# Altium PCB PCB.PcbDoc
Units mm, origin at the board's own origin, x right, y up, seen from the top; angles counter-clockwise.
Board outline 135 x 101 mm, 2 copper layers (Top Layer, Bottom Layer); 58 components, 37 nets, 347 pads, 5 vias.
Unrouted connection lines stored in the file: 178.
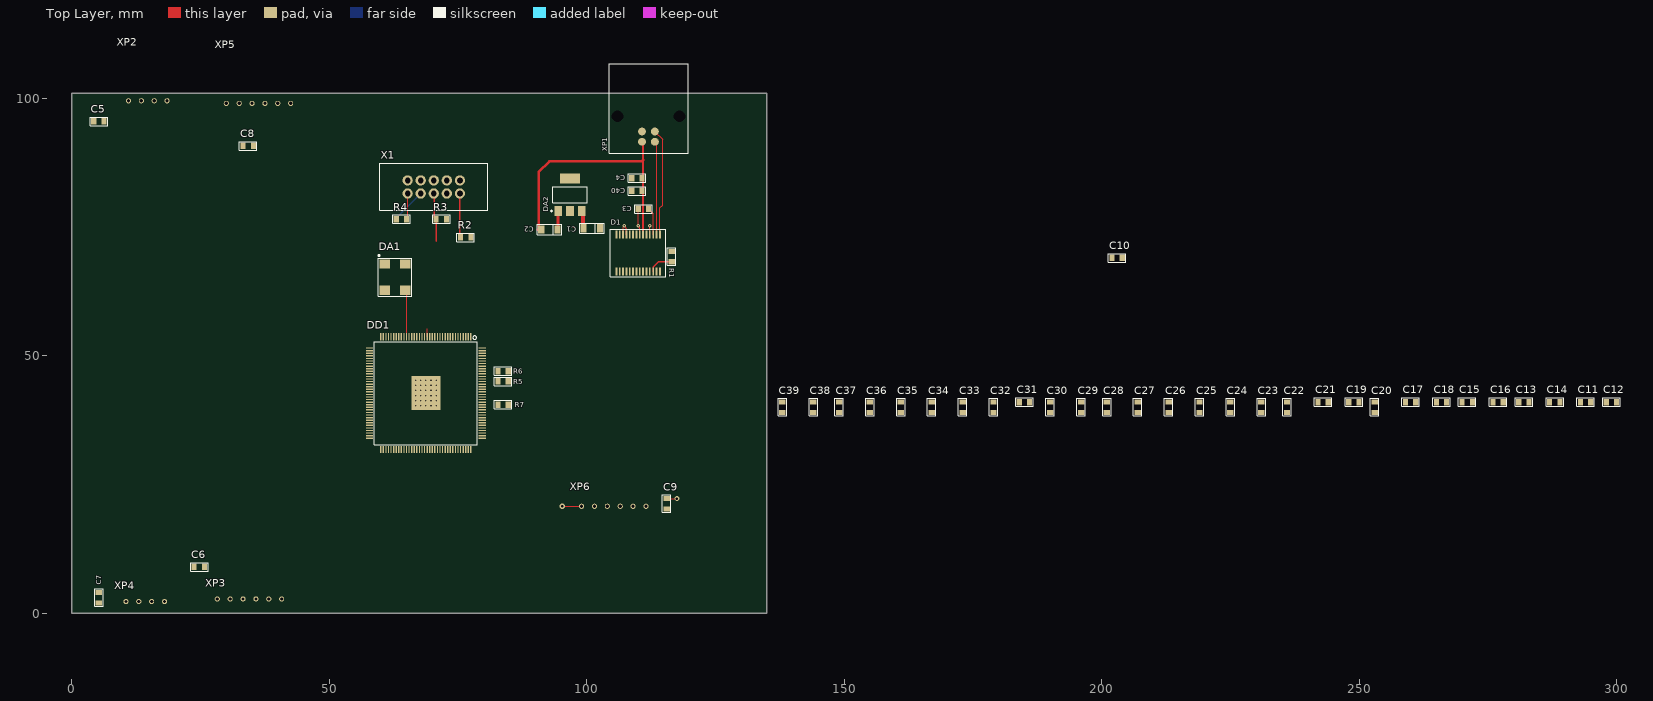
[diagram p0: Top Layer view]
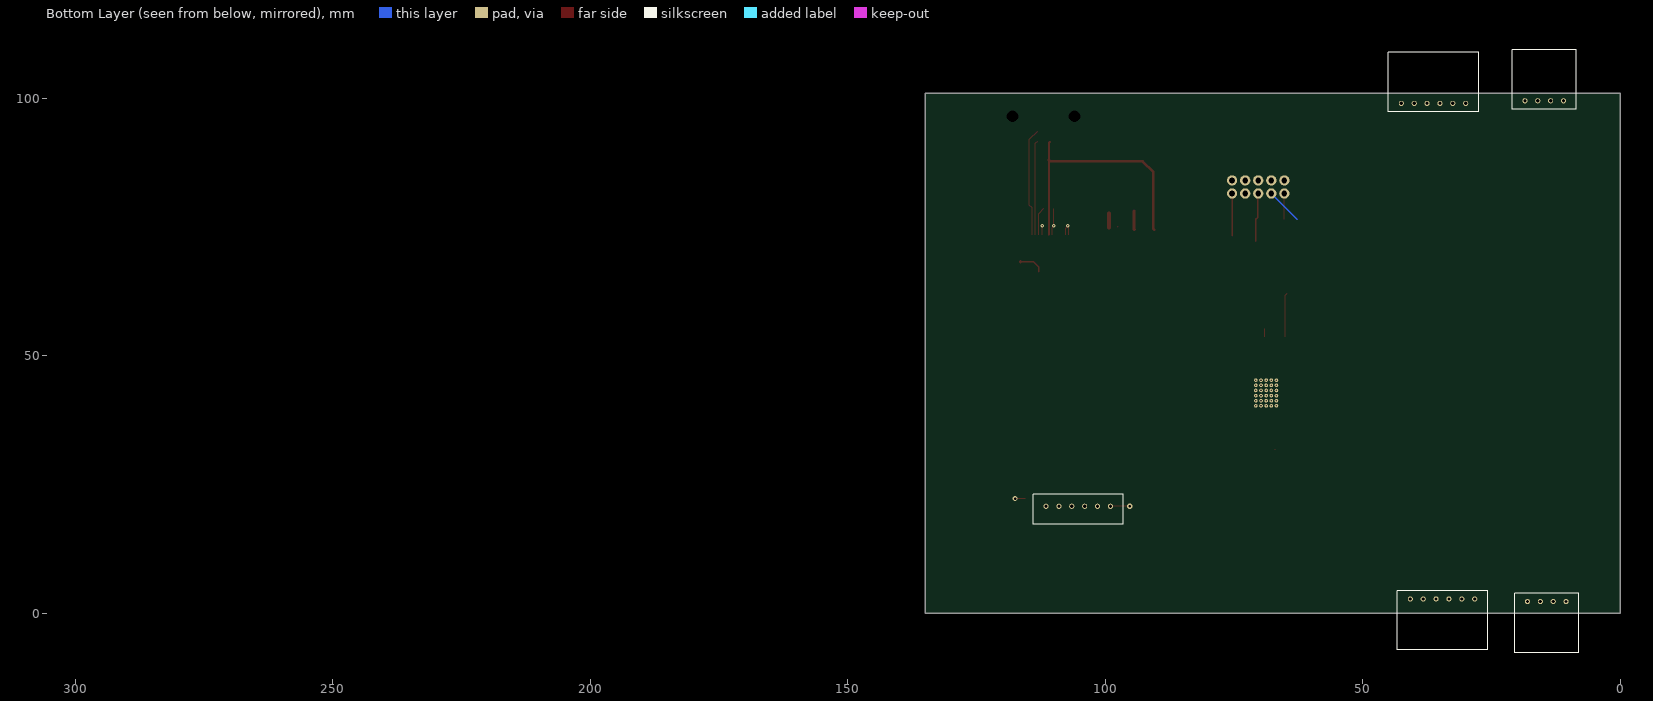
[diagram p1: Bottom Layer view, seen from below]

## Layer stack, top to bottom
Top Solder: solder mask 0.0102, Solder Resist, Dk 3.5
Top Layer: signal copper 0.0356
Dielectric 1: dielectric 0.32, FR-4, Dk 4.8
Bottom Layer: signal copper 0.0356
Bottom Solder: solder mask 0.0102, Solder Resist, Dk 3.5

## Board outline
0,0 0,101 135,101 135,0

## Design rules (kind name [scope] priority, off if disabled: settings)
Clearance [All] p1: gap=0.254 ignorepadtopadclearanceinfootprint=FALSE except(0: Arc-Hole Track-Hole SMDPad-Hole THPad-Hole Via-Hole Fill-Hole Poly-Hole Region-Hole Text-Hole)
PolygonConnect [All] p1: connectstyle=Relief reliefconductorwidth=0.254 reliefentries=4 polygonreliefangle="90 Angle" airgapwidth=0.254
RoutingVias [All] p1: holewidth=0.3 width=0.7 viastyle="Through Hole" minholewidth=0.3 minwidth=0.7 maxholewidth=0.3 maxwidth=0.7
SolderMaskExpansion [All] p1: expansion=0.102
Width [All] p1: maxlimit=0.8 minlimit=0.2 preferedwidth=0.4 bottomlayer_minwidth=0.3 minimp=50.000000 maximp=50.000000 favimp=50.000000
30 further rules are at their usual default settings.

## Classes and differential pairs
component class Page2: C11 C12 C13 C14 C15 C16 C17 C18 C19 C20 C21 C22 C23 C24 C25 C26 C27 C28 C29 C30 C31 C32 C33 C34 C35 C36 C37 C38 C39
component class Page1: C1 C2 C3 C4 C40 D1 DA2 R1 XP1
component class Connectors: C5 C6 C7 C8 C9 C10 DA1 DD1 R2 R3 R4 R5 R6 R7 X1 XP2 XP3 XP4 XP5 XP6 XP7

## Components (designator, comment, footprint, x,y, rotation, side; value= is the part's Value field where it differs from the comment)
C1 "Tantalum capacitor, 10μF, 10V, ±10%, 2Ohm, case A (3216), -55...+85°C" "CAP: TANTAL-A" 101,74.75 r180 top value=10?F
C2 "Tantalum capacitor, 10μF, 10V, ±10%, 2Ohm, case A (3216), -55...+85°C" "CAP: TANTAL-A" 92.75,74.5 r180 top value=10?F
C3 "Ceramic capacitor, 0.1μF, X7R, ±10%, , 0805, -55...+125°C" "CAP: 0805" 111,78.5 r180 top value=0.1?F
C4 "Ceramic capacitor, 0.1μF, X7R, ±10%, , 0805, -55...+125°C" "CAP: 0805" 109.75,84.5 r180 top value=0.1?F
C5 "Ceramic capacitor, 0.1μF, X7R, , , 0805," "CAP: 0805" 5.25,95.5 r0 top value=0.1?F
C6 "Ceramic capacitor, 0.1μF, X7R, , , 0805," "CAP: 0805" 24.75,9 r0 top value=0.1?F
C7 "Ceramic capacitor, 0.01μF, X7R, , , 0805," "CAP: 0805" 5.25,3 r90 top value=0.01?F
C8 "Ceramic capacitor, 0.1μF, X7R, , , 0805," "CAP: 0805" 34.25,90.75 r0 top value=0.1?F
C9 "Ceramic capacitor, 0.1μF, X7R, , , 0805," "CAP: 0805" 115.5,21.25 r90 top value=0.1?F
C10 "Ceramic capacitor, 0.1μF, X7R, , , 0805," "CAP: 0805" 203,69 r0 top value=0.1?F
C11 "Ceramic capacitor, 0.1μF, X7R, , , 0805," "CAP: 0805" 294,41 r0 top value=0.1?F
C12 "Ceramic capacitor, 0.1μF, X7R, , , 0805," "CAP: 0805" 299,41 r0 top value=0.1?F
C13 "Ceramic capacitor, 0.1μF, X7R, , , 0805," "CAP: 0805" 282,41 r0 top value=0.1?F
C14 "Ceramic capacitor, 0.1μF, X7R, , , 0805," "CAP: 0805" 288,41 r0 top value=0.1?F
C15 "Ceramic capacitor, 0.1μF, X7R, , , 0805," "CAP: 0805" 271,41 r0 top value=0.1?F
C16 "Ceramic capacitor, 0.1μF, X7R, , , 0805," "CAP: 0805" 277,41 r0 top value=0.1?F
C17 "Ceramic capacitor, 0.1μF, X7R, , , 0805," "CAP: 0805" 260,41 r0 top value=0.1?F
C18 "Ceramic capacitor, 0.1μF, X7R, , , 0805," "CAP: 0805" 266,41 r0 top value=0.1?F
C19 "Ceramic capacitor, 0.1μF, X7R, , , 0805," "CAP: 0805" 249,41 r0 top value=0.1?F
C20 "Ceramic capacitor, 0.1μF, X7R, , , 0805," "CAP: 0805" 253,40 r90 top value=0.1?F
C21 "Ceramic capacitor, 0.1μF, X7R, , , 0805," "CAP: 0805" 243,41 r0 top value=0.1?F
C22 "Ceramic capacitor, 0.1μF, X7R, , , 0805," "CAP: 0805" 236,40 r90 top value=0.1?F
C23 "Ceramic capacitor, 0.1μF, X7R, , , 0805," "CAP: 0805" 231,40 r90 top value=0.1?F
C24 "Ceramic capacitor, 0.1μF, X7R, , , 0805," "CAP: 0805" 225,40 r90 top value=0.1?F
C25 "Ceramic capacitor, 0.1μF, X7R, , , 0805," "CAP: 0805" 219,40 r90 top value=0.1?F
C26 "Ceramic capacitor, 0.1μF, X7R, , , 0805," "CAP: 0805" 213,40 r90 top value=0.1?F
C27 "Ceramic capacitor, 0.1μF, X7R, , , 0805," "CAP: 0805" 207,40 r90 top value=0.1?F
C28 "Ceramic capacitor, 0.1μF, X7R, , , 0805," "CAP: 0805" 201,40 r90 top value=0.1?F
C29 "Ceramic capacitor, 0.1μF, X7R, , , 0805," "CAP: 0805" 196,40 r90 top value=0.1?F
C30 "Ceramic capacitor, 0.1μF, X7R, , , 0805," "CAP: 0805" 190,40 r90 top value=0.1?F
C31 "Ceramic capacitor, 0.1μF, X7R, , , 0805," "CAP: 0805" 185,41 r0 top value=0.1?F
C32 "Ceramic capacitor, 0.1μF, X7R, , , 0805," "CAP: 0805" 179,40 r90 top value=0.1?F
C33 "Ceramic capacitor, 0.1μF, X7R, , , 0805," "CAP: 0805" 173,40 r90 top value=0.1?F
C34 "Ceramic capacitor, 0.1μF, X7R, , , 0805," "CAP: 0805" 167,40 r90 top value=0.1?F
C35 "Ceramic capacitor, 0.1μF, X7R, , , 0805," "CAP: 0805" 161,40 r90 top value=0.1?F
C36 "Ceramic capacitor, 0.1μF, X7R, , , 0805," "CAP: 0805" 155,40 r90 top value=0.1?F
C37 "Ceramic capacitor, 0.1μF, X7R, , , 0805," "CAP: 0805" 149,40 r90 top value=0.1?F
C38 "Ceramic capacitor, 0.1μF, X7R, , , 0805," "CAP: 0805" 144,40 r90 top value=0.1?F
C39 "Ceramic capacitor, 0.1μF, X7R, , , 0805," "CAP: 0805" 138,40 r90 top value=0.1?F
C40 "Ceramic capacitor, 4.7μF, X7R, ±10%, , 0805, -55...+125°C" "CAP: 0805" 109.75,82 r180 top value=4.7?F
D1 "FT245RL-REEL" 28-SSOP 109.975,69.925 r90 top
DA1 "*" "4-SMD, NO LEAD" 62.75,65.25 r270 top
DA2 "*" SOT-223 96.75,81.25 r90 top
DD1 "10M02SCE144C8G" "144-Lead EQFP" 68.75,42.75 r270 top
R1 "Resistor film, 10K, , 0805, 0.125W, -55...+125°C" "RES: 0805" 116.5,69.25 r270 top value=10K
R2 "Resistor film, 10k, , 0805, ," "RES: 0805" 76.5,73 r0 top value=10k
R3 "Resistor film, 10k, , 0805, ," "RES: 0805" 71.75,76.5 r0 top value=10k
R4 "Resistor film, 1k, , 0805, ," "RES: 0805" 64,76.5 r0 top value=1k
R5 "Resistor film, 10k, , 0805, ," "RES: 0805" 83.75,45 r0 top value=10k
R6 "Resistor film, 10k, , 0805, ," "RES: 0805" 83.75,47 r0 top value=10k
R7 "Resistor film, 10k, , 0805, ," "RES: 0805" 83.75,40.5 r0 top value=10k
X1 "*" IDC-10MS 70.29,81.5 r0 top
XP1 "\"USB B\"" "USB B" 111.98,92.54 r180 top
XP2 "pw 10-4-M-R" "PW 10-4 - M - R" 18.5,99.5 r180 top
XP3 "pw 10-6-M-R" "PW 10-6-M - R" 28.25,2.75 r0 top
XP4 "pw 10-4-M-R" "PW 10-4 - M - R" 10.5,2.25 r0 top
XP5 "pw 10-6-M-R" "PW 10-6-M - R" 42.5,99 r180 top
XP6 "pw 10-6-M-R 5V" "PW 10-6-M" 111.5,20.75 r180 top

## Footprints (in the part's own frame and the unit in brackets; to place one, negate y for a bottom-side part, rotate by r counter-clockwise, add the part's x,y. Pads: shape width x height; smd on the part's side, far side on the other; paste and mask are expansions set on the pad)
"4-SMD, NO LEAD" [mm]
  rect 1.8x2 smd: 1(-2.54,-2) 2(2.54,-2) 3(2.54,2) 4(-2.54,2)
  silkscreen extent -4.37,-3.24 3.72,3.22, body extent -3.5,-2.54 3.5,2.54, height 1.8
28-SSOP [mm]
  rect 1.55x0.35 smd: 1(-3.575,4.225) 2(-3.575,3.575) 3(-3.575,2.925) 4(-3.575,2.275) 5(-3.575,1.625) 6(-3.575,0.975) 7(-3.575,0.325) 8(-3.575,-0.325) 9(-3.575,-0.975) 10(-3.575,-1.625) 11(-3.575,-2.275) 12(-3.575,-2.925) 13(-3.575,-3.575) 14(-3.575,-4.225) 15(3.575,-4.225) 16(3.575,-3.575) 17(3.575,-2.925) 18(3.575,-2.275) 19(3.575,-1.625) 20(3.575,-0.975) 21(3.575,-0.325) 22(3.575,0.325) 23(3.575,0.975) 24(3.575,1.625) 25(3.575,2.275) 26(3.575,2.925) 27(3.575,3.575) 28(3.575,4.225)
  silkscreen extent -4.62,-5.38 4.62,5.43, body extent -3.88,-5.16 3.88,5.17, height 2.16
"144-Lead EQFP" [mm]
  round 0.7 hole 0.3: 0(-2.5,1) 0(-2.5,2) 0(-2.5,0) 0(-2.5,-2) 0(-2.5,-1) 0(-1.5,2) 0(-1.5,1) 0(-1.5,0) 0(-1.5,-1) 0(-1.5,-2) 0(-0.5,2) 0(-0.5,1) 0(-0.5,0) 0(-0.5,-1) 0(-0.5,-2) 0(0.5,2) 0(0.5,1) 0(0.5,0) 0(0.5,-1) 0(0.5,-2) 0(1.5,2) 0(1.5,1) 0(1.5,0) 0(1.5,-1) 0(1.5,-2) 0(2.5,1) 0(2.5,2) 0(2.5,0) 0(2.5,-2) 0(2.5,-1)
  rect 6.6x5.6 smd: 0(0,0)
  rect 1.4x0.25 smd: 1(-10.925,8.75) 2(-10.925,8.25) 3(-10.925,7.75) 4(-10.925,7.25) 5(-10.925,6.75) 6(-10.925,6.25) 7(-10.925,5.75) 8(-10.925,5.25) 9(-10.925,4.75) 10(-10.925,4.25) 11(-10.925,3.75) 12(-10.925,3.25) 13(-10.925,2.75) 14(-10.925,2.25) 15(-10.925,1.75) 16(-10.925,1.25) 17(-10.925,0.75) 18(-10.925,0.25) 19(-10.925,-0.25) 20(-10.925,-0.75) 21(-10.925,-1.25) 22(-10.925,-1.75) 23(-10.925,-2.25) 24(-10.925,-2.75) 25(-10.925,-3.25) 26(-10.925,-3.75) 27(-10.925,-4.25) 28(-10.925,-4.75) 29(-10.925,-5.25) 30(-10.925,-5.75) 31(-10.925,-6.25) 32(-10.925,-6.75) 33(-10.925,-7.25) 34(-10.925,-7.75) 35(-10.925,-8.25) 36(-10.925,-8.75) 73(10.95,-8.75) 74(10.95,-8.25) 75(10.95,-7.75) 76(10.95,-7.25) 77(10.95,-6.75) 78(10.95,-6.25) 79(10.95,-5.75) 80(10.95,-5.25) 81(10.95,-4.75) 82(10.95,-4.25) 83(10.95,-3.75) 84(10.95,-3.25) 85(10.95,-2.75) 86(10.95,-2.25) 87(10.95,-1.75) 88(10.95,-1.25) 89(10.95,-0.75) 90(10.95,-0.25) 91(10.95,0.25) 92(10.95,0.75) 93(10.95,1.25) 94(10.95,1.75) 95(10.95,2.25) 96(10.95,2.75) 97(10.95,3.25) 98(10.95,3.75) 99(10.95,4.25) 100(10.95,4.75) 101(10.95,5.25) 102(10.95,5.75) 103(10.95,6.25) 104(10.95,6.75) 105(10.95,7.25) 106(10.95,7.75) 107(10.95,8.25) 108(10.95,8.75)
  rect 0.25x1.4 smd: 37(-8.725,-10.95) 38(-8.225,-10.95) 39(-7.725,-10.95) 40(-7.225,-10.95) 41(-6.725,-10.95) 42(-6.225,-10.95) 43(-5.725,-10.95) 44(-5.225,-10.95) 45(-4.725,-10.95) 46(-4.225,-10.95) 47(-3.725,-10.95) 48(-3.225,-10.95) 49(-2.725,-10.95) 50(-2.225,-10.95) 51(-1.725,-10.95) 52(-1.225,-10.95) 53(-0.725,-10.95) 54(-0.225,-10.95) 55(0.275,-10.95) 56(0.775,-10.95) 57(1.275,-10.95) 58(1.775,-10.95) 59(2.275,-10.95) 60(2.775,-10.95) 61(3.275,-10.95) 62(3.775,-10.95) 63(4.275,-10.95) 64(4.775,-10.95) 65(5.275,-10.95) 66(5.775,-10.95) 67(6.275,-10.95) 68(6.775,-10.95) 69(7.275,-10.95) 70(7.775,-10.95) 71(8.275,-10.95) 72(8.775,-10.95) 109(8.775,10.95) 110(8.275,10.95) 111(7.775,10.95) 112(7.275,10.95) 113(6.775,10.95) 114(6.275,10.95) 115(5.775,10.95) 116(5.275,10.95) 117(4.775,10.95) 118(4.275,10.95) 119(3.775,10.95) 120(3.275,10.95) 121(2.775,10.95) 122(2.275,10.95) 123(1.775,10.95) 124(1.275,10.95) 125(0.775,10.95) 126(0.275,10.95) 127(-0.225,10.95) 128(-0.725,10.95) 129(-1.225,10.95) 130(-1.725,10.95) 131(-2.225,10.95) 132(-2.725,10.95) 133(-3.225,10.95) 134(-3.725,10.95) 135(-4.225,10.95) 136(-4.725,10.95) 137(-5.225,10.95) 138(-5.725,10.95) 139(-6.225,10.95) 140(-6.725,10.95) 141(-7.225,10.95) 142(-7.725,10.95) 143(-8.225,10.95) 144(-8.725,10.95)
  silkscreen extent -11.1,-10 10,10, body extent -10.97,-11 11.03,11, height 1.65
"CAP: 0805" [mm]
  rect 1x1.25 smd: 1(-1,0) 2(1,0)
  silkscreen extent -1.7,-0.82 1.7,0.82, body extent -1,-0.62 1,0.63, height 0.78
"CAP: TANTAL-A" [mm]
  rect 1.2x1.6 smd: 1(-1.6,0) 2(1.6,0)
  silkscreen extent -2.4,-1 2.4,1, body extent -1.7,-0.84 1.7,0.84, height 1.71
IDC-10MS [mm]
  round 2 hole 1.1: 1(-5.08,0) 2(-5.08,2.54) 3(-2.54,0) 4(-2.54,2.54) 5(0,0) 6(0,2.54) 7(2.54,0) 8(2.54,2.54) 9(5.08,0) 10(5.08,2.54)
  silkscreen extent -10.45,-3.25 10.45,5.9, body extent -10.32,-3.13 10.28,5.68, height 9.1
"PW 10-4 - M - R" [mm]
  round 1 hole 0.64: 1(0,0) 2(2.5,0) 3(5,0) 4(7.5,0)
  body extent 1.5,0 1.5,0, height 5.7
"PW 10-6-M" [mm]
  round 1 hole 0.64: 1(0,0) 2(2.5,0) 3(5,0) 4(7.5,0) 5(10,0) 6(12.5,0)
  body extent -2.5,-2.25 15,3.45, height 8
"PW 10-6-M - R" [mm]
  round 1 hole 0.64: 1(0,0) 2(2.5,0) 3(5,0) 4(7.5,0) 5(10,0) 6(12.5,0)
  body extent 1.5,0 1.5,0, height 5.7
"RES: 0805" [mm]
  rect 1x1.25 smd: 1(-1,0) 2(1,0)
  silkscreen extent -1.7,-0.82 1.7,0.82, body extent -1,-0.6 1,0.6, height 0.44
SOT-223 [mm]
  rect 2x1.5 smd: 1(-3.15,2.3) 2(-3.15,0) 3(-3.15,-2.3)
  rect 2x3.8 smd: 4(3.15,0)
  silkscreen extent -3.27,-3.35 1.55,3.72, body extent -3.3,-3.35 3.7,3.15, height 1.64
"USB B" [mm]
  round 1.524 hole 2.3: 0(-6.02,-3.96) 0(6.02,-3.96)
  round 1.524 smd: 1(1.25,1) 3(-1.25,-1) 4(1.25,-1)
  round 1.524 smd mask+0.1: 2(-1.25,1)
  silkscreen extent -7.7,-14.2 7.6,3.2, body extent -7.43,-13.99 7.43,3.01, height 11

## Part data
C1 C2: library part Tantal_A, Package="case A (3216)", PartNumber=F930J107KAAAJ6, Temperature=-55...+85°C, Tolerance=±10%, TypeCapacitor="Tantalum capacitor", TypeDielectric=X7R, ValueManufacturerPartNumber="Tantalum capacitor, 10?F, 10V, ±10%, 2Ohm, case A (3216), -55...+85°C", Voltage=10V, HelpURL=https://www.digikey.com/product-detail/en/avx-corporation/F930J107KAAAJ6/478-12404-1-ND/9645231, Impedance=2Ohm
C3 C4: library part Ceramic_0805, Manufacturer=Yageo, Package=0805, PartNumber=CC0805KRX7R7BB104, Temperature=-55...+125°C, Tolerance=±10%, TypeCapacitor="Ceramic capacitor", TypeDielectric=X7R, ValueManufacturerPartNumber="Ceramic capacitor, 0.1?F, X7R, ±10%, , 0805, -55...+125°C", HelpURL=https://www.digikey.com/product-detail/en/yageo/CC0805KRX7R7BB104/311-1142-1-ND/303052
C5 C6 C8 C9 C10 C11 C12 C13 C14 C15 C16 C17 C18 C19 C20 C21 C22 C23 C24 C25 C26 C27 C28 C29 C30 C31 C32 C33 C34 C35 C36 C37 C38 C39: library part Ceramic_0805, Package=0805, TypeCapacitor="Ceramic capacitor", TypeDielectric=X7R, ValueManufacturerPartNumber="Ceramic capacitor, 0.1?F, X7R, , , 0805,"
C7: library part Ceramic_0805, Package=0805, TypeCapacitor="Ceramic capacitor", TypeDielectric=X7R, ValueManufacturerPartNumber="Ceramic capacitor, 0.01?F, X7R, , , 0805,"
C40: library part Ceramic_0805, Manufacturer=Yageo, Package=0805, PartNumber=CC0805KRX7R7BB104, Temperature=-55...+125°C, Tolerance=±10%, TypeCapacitor="Ceramic capacitor", TypeDielectric=X7R, ValueManufacturerPartNumber="Ceramic capacitor, 4.7?F, X7R, ±10%, , 0805, -55...+125°C", HelpURL=https://www.digikey.com/product-detail/en/yageo/CC0805KRX7R7BB104/311-1142-1-ND/303052
D1: "IC USB TO PARALLEL FIFO 28-SSOP", Case=28-SSOP, Manufature="FTDI, Future Technology Devices International Ltd", HelpURL=https://www.digikey.com/product-detail/en/ftdi-future-technology-devices-international-ltd/FT245RL-REEL/768-1011-2-ND/1836389, Model=FT245RL-REEL
DA1: library part "SG 8002", "Oscillator", Manufacturer=EPSON, HelpURL=https://support.epson.biz/td/api/doc_check.php?dl=brief_SG-8002CA&lang=en
DA2: library part MIC5233, "Voltage Regulator", PartNumber=MIC5233-3.3YS
DD1: "MAX10 FPGA", Manufacturer=Intel, HelpURL=https://www.digikey.com/product-detail/en/intel/10M02SCE144C8G/544-3098-ND/5284822, PartNumber=10M02SCE144C8G
R1: library part Resistor_0805, Manufacturer=Yageo, Package=0805, PartNumber=RC0805JR-07100RL, Power=0.125W, Temperature=-55...+125°C, TypeResistor="Resistor film", HelpURL=https://www.digikey.com/product-detail/en/yageo/RC0805JR-07100RL/311-100ARCT-ND/731185, ValueManufacturerPartNumber="Resistor film, 10K, , 0805, 0.125W, -55...+125°C"
R2 R3 R4 R5 R6 R7: library part Resistor_0805, Package=0805, TypeResistor="Resistor film"
  R2 R3 R5 R6 R7: ValueManufacturerPartNumber="Resistor film, 10k, , 0805, ,"
  R4: ValueManufacturerPartNumber="Resistor film, 1k, , 0805, ,"
X1: library part "Connector 10-pin", "Connector"
XP1: library part "USB B", Type Connector="USB type B"

## Via types
v1: diameter 0.7, hole 0.3, Top Layer to Bottom Layer, 3 vias
v2: diameter 1, hole 0.5, Top Layer to Bottom Layer, 2 vias

## Nets (pads, with @x,y where several pads share a name; then routed paths per layer and width w, separated by ;. In a path a pad name is that pad's centre, name@x,y a point inside that pad or via, vN(x,y) a via of type N, cw(c..) or ccw(c..) an arc to the next point about the centre after c; other vN are vias at no path point)
+5: C2.2 C4.1 C10.1 C40.1 D1.20 R1.1 XP1.1 XP6.1 | length 50.8
  Top Layer w0.2: 90.5,74.5 C2.2@90.65,74.5
  Top Layer w0.4: XP1.1 110.954,91.316 110.954,88 110.954,73.504 D1.20
  Top Layer w0.5: 90.5,74.5 90.65,74.65 90.65,85.65 92.75,87.75 110.704,87.75 110.954,88
CS_1: DD1.33 XP3.4
CS_2: DD1.24 XP5.4
CS_3: DD1.87 XP6.4 | length 0
  Top Layer w0.2: DD1.87@66.979,31.779 DD1.87
GND: C3.2 C4.2 C5.2 C6.2 C7.1 C8.2 C9.2 C10.2 C11.2 C12.1 C13.2 C14.1 C15.2 C16.1 C17.2 C18.1 C19.2 C20.1 C21.2 C22.2 C23.2 C24.2 C25.2 C26.2 C27.2 C28.2 C29.2 C30.2 C31.2 C32.2 C33.2 C34.2 C35.2 C36.2 C37.2 C38.2 C39.2 C40.2 D1.7 D1.18 D1.21 D1.25 D1.26 DA1.2 DA2.2 DD1.0 DD1.11 DD1.20 DD1.30 DD1.38 DD1.45 DD1.57 DD1.66 DD1.83 DD1.96 DD1.104 DD1.110 DD1.119 DD1.133 DD1.143 R4.1 X1.2 X1.10 XP1.4 XP2.4 XP3.6 XP4.4 XP5.6 XP6.6 | length 16
  Top Layer w0.2: v2(95.25,20.75) XP6.6 ; D1.26 107.05,74.915 ; v1(107.25,75.25) 107.25,75.231 107.7,74.781 D1.25 ; C3.2 v1(110,75.25) 110,75.115 110.3,74.815 D1.21 ; D1.18 v1(112.25,75.25) ; C9.2 v2(117.5,22.25)
MISO: DD1.25 XP3.2 XP5.2 XP6.2
MOSI/SO: DD1.28 XP3.3 XP5.3 XP6.3
NetC1_2: C1.2 DA2.3 | length 2.9
  Top Layer w0.2: 97.45,74.9 97.6,75.05
  Top Layer w0.8: C1.2@99.3,74.9 DA2.3@99.3,77.6
NetC2_1: C2.1 DA2.1 | length 3.6
  Top Layer w0.6: C2.1 94.4,74.55 94.4,78.05 DA2.1
NetC3_1: C3.1 D1.4 D1.17 | length 5.4
  Top Layer w0.2: C3.1 112.954,77.546 112.954,73.554 D1.17
NetD1_1: D1.1 DD1.97
NetD1_2: D1.2 DD1.101
NetD1_3: D1.3 DD1.98
NetD1_5: D1.5 DD1.99
NetD1_6: D1.6 DD1.106
NetD1_9: D1.9 DD1.103
NetD1_10: D1.10 DD1.105
NetD1_11: D1.11 DD1.100
NetD1_12: D1.12 R1.2 | length 4.9
  Top Layer w0.3: D1.12 112.925,66.375 112.925,67.246 113.929,68.25 R1.2
NetD1_15: D1.15 XP1.3 | length 20.9
  Top Layer w0.2: XP1.3 114.75,92.02 114.75,79.25 114.2,78.7 D1.15
NetD1_16: D1.16 XP1.2 | length 18.2
  Top Layer w0.2: XP1.2 113.55,91.22 D1.16
NetDD1_15: DD1.15 R3.1 X1.5 | length 9.4
  Top Layer w0.3: X1.5 70.4,81.39 70.4,76.85 R3.1 70.75,72.25
NetDD1_122: DD1.122 R7.1
NetDD1_131: DD1.131 R5.1
NetDD1_135: DD1.135 R6.1
OSC_OUT: DA1.3 DD1.26 | length 8.4
  Top Layer w0.2: DA1.3@64.71,62 65,61.71 DD1.26
RD: D1.13 DD1.90
RXF: D1.23 DD1.88
SCL: DD1.31
SDA: DD1.32 XP2.2 XP4.2
SPI_CLK: DD1.27 XP3.5 XP5.5 XP6.5
TCK: DD1.16 R4.2 X1.1 | length 5
  Top Layer w0.2: X1.1@65.25,81.5 65.25,76.5 R4.2@65.253,76.497
TDI: DD1.17 R2.1 X1.9 | length 8.2
  Top Layer w0.3: R2.1@75.37,73.255 X1.9
TDO: DD1.18 X1.3 | length 8.6
  Top Layer w0.2: DD1.18 69,55.25
  Bottom Layer w0.3: 62.75,76.5 X1.3
TXE: D1.22 DD1.89
VCC3V3: C1.1 C5.1 C6.1 C7.2 C8.1 C9.1 C11.1 C12.2 C13.1 C14.2 C15.1 C16.2 C17.1 C18.2 C19.1 C20.2 C21.1 C22.1 C23.1 C24.1 C25.1 C26.1 C27.1 C28.1 C29.1 C30.1 C31.1 C32.1 C33.1 C34.1 C35.1 C36.1 C37.1 C38.1 C39.1 DA1.4 DD1.1 DD1.2 DD1.12 DD1.22 DD1.29 DD1.34 DD1.35 DD1.36 DD1.37 DD1.43 DD1.56 DD1.58 DD1.64 DD1.71 DD1.72 DD1.73 DD1.82 DD1.93 DD1.102 DD1.107 DD1.108 DD1.109 DD1.111 DD1.118 DD1.121 DD1.132 DD1.136 DD1.142 DD1.144 R2.2 R3.2 R5.2 R6.2 R7.2 X1.4 XP2.1 XP3.1 XP4.1 XP5.1
WR: D1.14 DD1.91
pads on no net: D1.8 D1.19 D1.24 D1.27 D1.28 DA1.1 DA2.4 DD1.3 DD1.4 DD1.5 DD1.6 DD1.7 DD1.8 DD1.9 DD1.10 DD1.13 DD1.14 DD1.19 DD1.21 DD1.23 DD1.39 DD1.40 DD1.41 DD1.42 DD1.44 DD1.46 DD1.47 DD1.48 DD1.49 DD1.50 DD1.51 DD1.52 DD1.53 DD1.54 DD1.55 DD1.59 DD1.60 DD1.61 DD1.62 DD1.63 DD1.65 DD1.67 DD1.68 DD1.69 DD1.70 DD1.74 DD1.75 DD1.76 DD1.77 DD1.78 DD1.79 DD1.80 DD1.81 DD1.84 DD1.85 DD1.86 DD1.92 DD1.94 DD1.95 DD1.112 DD1.113 DD1.114 DD1.115 DD1.116 DD1.117 DD1.120 DD1.123 DD1.124 DD1.125 DD1.126 DD1.127 DD1.128 DD1.129 DD1.130 DD1.134 DD1.137 DD1.138 DD1.139 DD1.140 DD1.141 X1.6 X1.7 X1.8 XP1.0 XP2.3 XP4.3

## Silkscreen, mask and mechanical layers (free items; w line width, h text height)
Drill Drawing:
  the board outline again, w0.5

## Dimensions
0,0 to 135,0 on Drill Drawing
0,101 to 0,0 on Drill Drawing